# Altium PCB PCB2.PcbDoc
Units mil, origin at the board's own origin, x right, y up, seen from the top; angles counter-clockwise.
Board outline 6000 x 4000 mil, 2 copper layers (Top Layer, Bottom Layer); 57 components, 64 nets, 232 pads, 0 vias.
Unrouted connection lines stored in the file: 134.
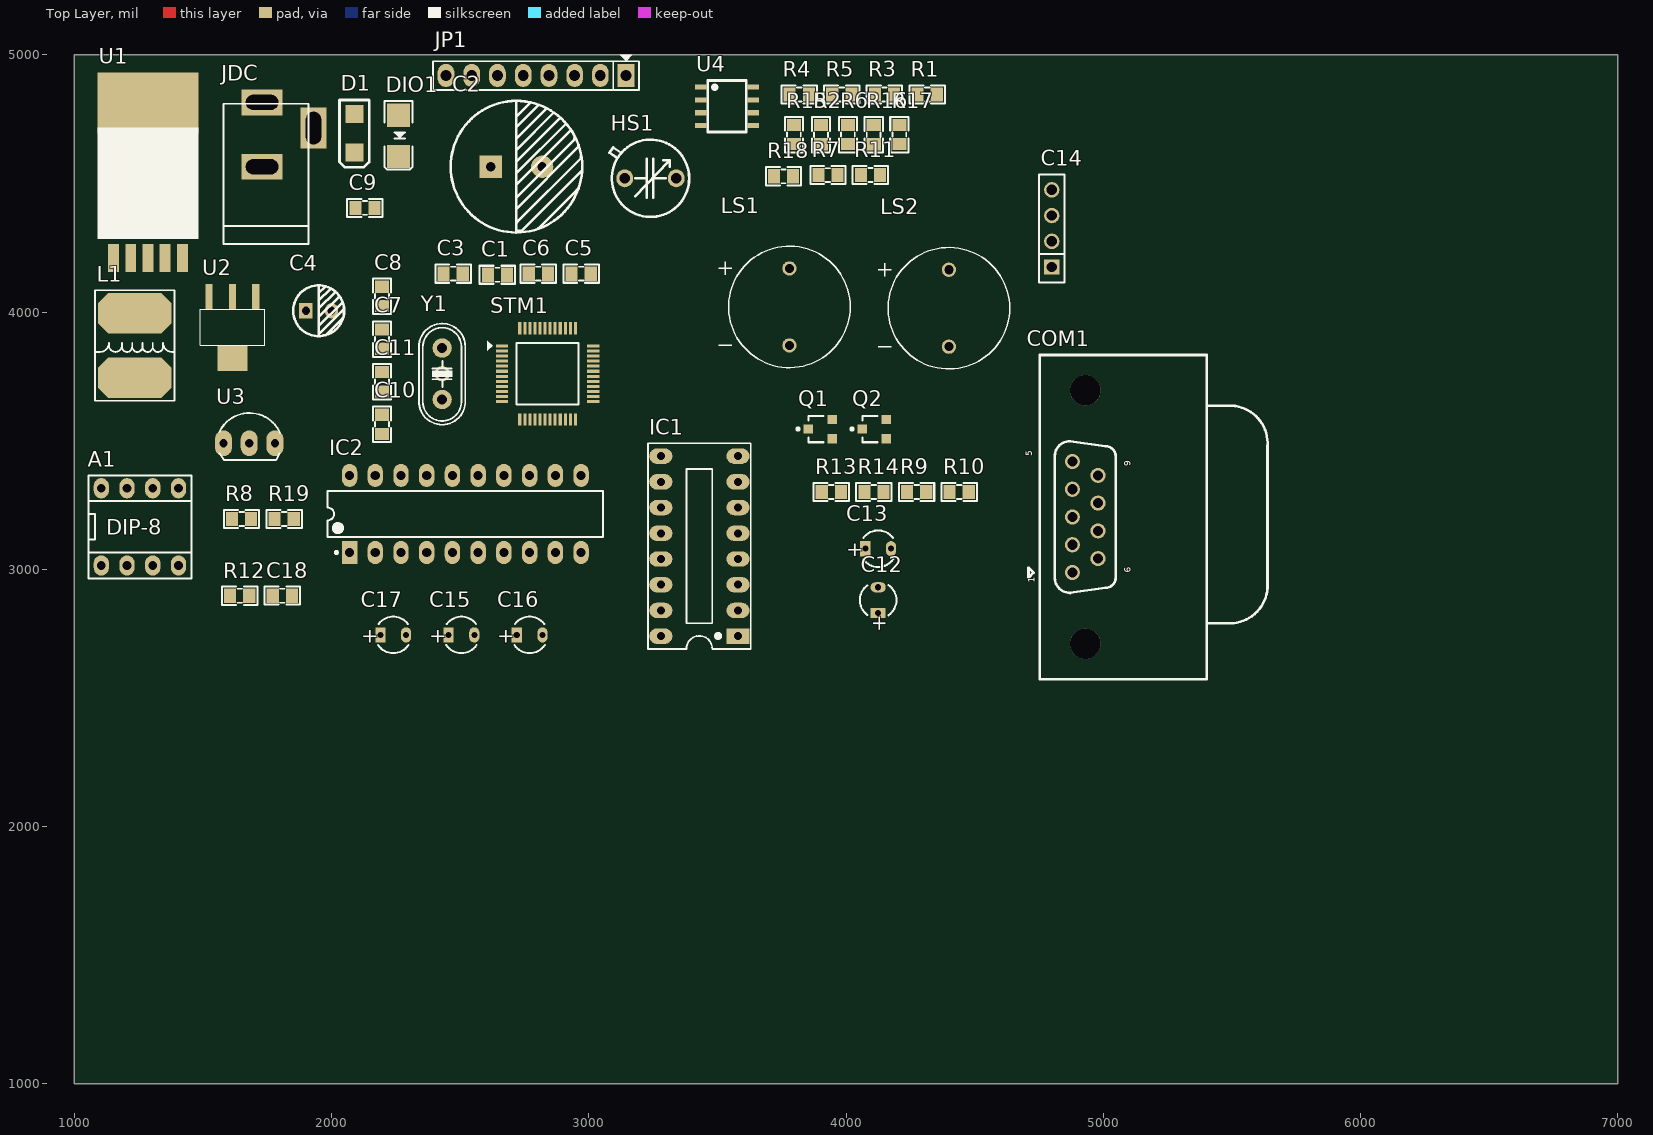
[diagram p0: Top Layer view]
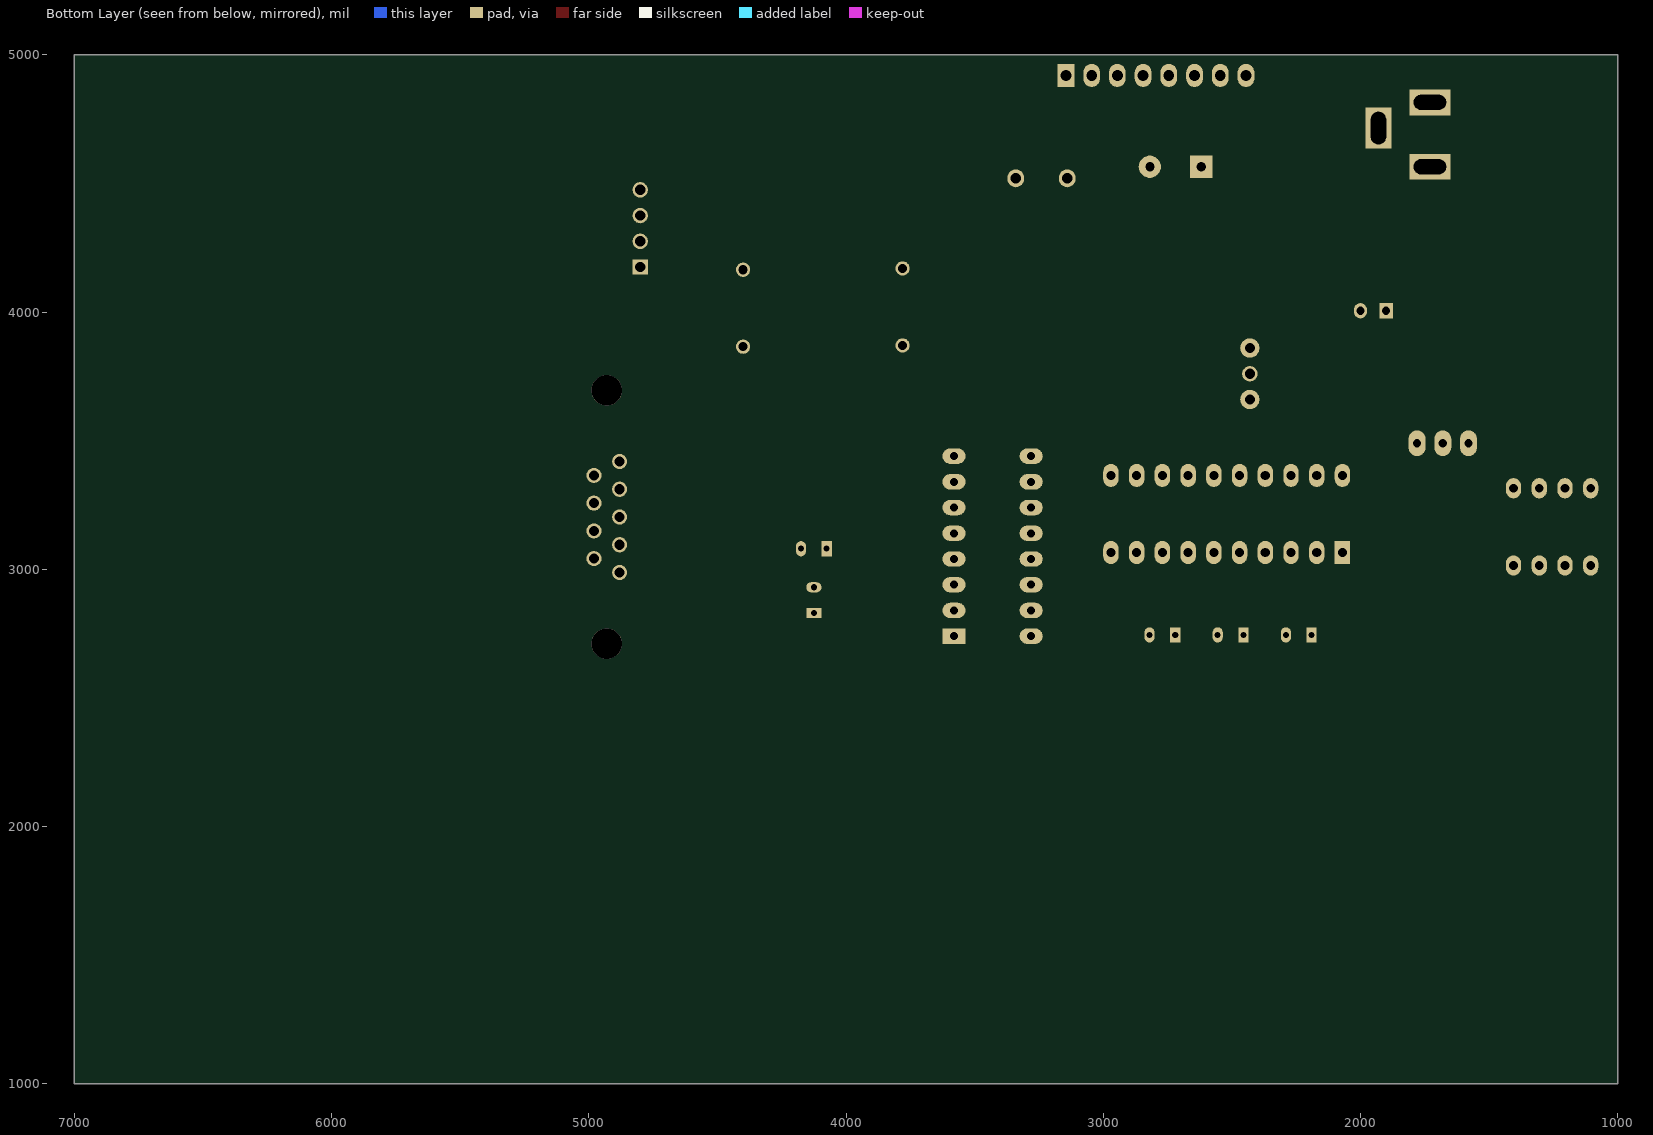
[diagram p1: Bottom Layer view, seen from below]

## Layer stack, top to bottom
Top Solder: solder mask 0.4, Solder Resist, Dk 3.5
Top Layer: signal copper 1.4
Dielectric 1: dielectric 12.6, FR-4, Dk 4.8
Bottom Layer: signal copper 1.4
Bottom Solder: solder mask 0.4, Solder Resist, Dk 3.5

## Board outline
1000,1000 7000,1000 7000,5000 1000,5000

## Design rules (kind name [scope] priority, off if disabled: settings)
Clearance [All] p1: gap=10 ignorepadtopadclearanceinfootprint=FALSE except(0: Arc-Hole Track-Hole SMDPad-Hole THPad-Hole Via-Hole Fill-Hole Poly-Hole Region-Hole Text-Hole)
PolygonConnect [All] p1: connectstyle=Relief reliefconductorwidth=10 reliefentries=4 polygonreliefangle="90 Angle" airgapwidth=10
RoutingVias [All] p1: holewidth=28 width=50 viastyle="Through Hole" minholewidth=28 minwidth=50 maxholewidth=28 maxwidth=50
SolderMaskExpansion [All] p1: expansion=4
Width [All] p1: maxlimit=10 minlimit=10 preferedwidth=10
30 further rules are at their usual default settings.

## Components (designator, comment, footprint, x,y, rotation, side; value= is the part's Value field where it differs from the comment)
A1 "LM358 SOP8" DIP8 1255,3165 r0 top
C1 "22pF" "tu 0805" 2645,4145 r0 top
C2 "680uF" "tu hoa 13mm" 2718.87,4565 r0 top
C3 "22pF" "tu 0805" 2472.68,4148.94 r180 top
C4 "220uF" "Tu hoa 5mm" 1950,4005 r0 top
C5 "100pF" "Tu 0805" 2970.3,4148.94 r180 top
C6 "100pF" "Tu 0805" 2804.42,4148.94 r180 top
C7 "100pF" "Tu 0805" 2195.79,3894.68 r90 top
C8 "100pF" "Tu 0805" 2195.79,4060.56 r90 top
C9 "104" "tu 0805" 2130,4405 r0 top
C10 "1uF" "tu 0805" 2195.79,3562.94 r90 top
C11 "10nF" "tu 0805" 2195.79,3728.81 r90 top
C12 "10uF/50V" C3MM 4125,2880 r90 top
C13 "10uF/50V" C3MM 4125,3080 r0 top
C14 "JP4" JP4-C1T 4800,4175 r90 top
C15 "10uF/50V" C3MM 2505,2745 r0 top
C16 "10uF/50V" C3MM 2770,2745 r0 top
C17 "10uF/50V" C3MM 2240,2745 r0 top
C18 "150pF" "tu 0805" 1808.61,2897.32 r0 top
COM1 "COM 9 FMALE" COM9A 4930,3203.19 r90 top value="COM 9"
D1 "Diode Zener" SMA 2090,4695.2 r90 top
DIO1 "Diode SMD" DIO-SMD-106 2260,4685 r90 top value=1N5007
HS1 "C1815 SOT23 TRANS NPN 0.15A 50V (SMD-HF)" "Cam Bien HS1101" 3240,4520 r0 top value="C?m Bi?n Ð? ?m HS1101"
IC1 "MAX232" DIP16/W0.3 3580,2740 r90 top
IC2 "ADC0804LCN" DIP20/W0.3 2520,3215 r0 top
JDC "3CELL_12V" DC-IN 1830,4690 r90 top
JP1 "LCD ST7735" JP8 3145,4920 r180 top value=JP7
L1 "33uH" "Cuon Cam 7.5x7x5" 1235,3720 r0 top
LS1 "BUZZER_T" XDCR_AI-1224-TWT-5V-R 3780,4020 r0 top
LS2 "BUZZER_T" XDCR_AI-1224-TWT-5V-R 4400,4015 r0 top
Q1 "2N222" SOT23 3900,3545 r90 top value=C1815
Q2 "2N222" SOT23 4110,3545 r90 top value=C1815
R1 "9.1k" "Tro SMD 0805" 4315.18,4848.4 r0 top
R2 "6.8k" "Tro SMD 0805" 3905,4690 r270 top
R3 "10k" "Tro SMD 0805" 4149.51,4848.4 r0 top
R4 "24k" "tro smd 0805" 3818.17,4848.4 r0 top
R5 "270k" "tro smd 0805" 3983.84,4848.4 r0 top
R6 "270k" "tro smd 0805" 4005,4690 r90 top
R7 "36k" "tro smd 0805" 3930,4530 r180 top
R8 "4.3k" "tro smd 0805" 1650.03,3198.06 r0 top
R9 "1k" "tro smd 0805" 4274.17,3303 r0 top
R10 "1k" "tro smd 0805" 4439.84,3303 r0 top
R11 "1k" "tro smd 0805" 4095,4535 r0 top
R12 "330" "tro smd 0805" 1642.83,2899.32 r0 top
R13 "10k" "tro smd 0805" 3942.83,3303 r0 top
R14 "10k" "tro smd 0805" 4108.5,3303 r0 top
R15 "360k" "Tro SMD 0805" 3795,4690 r90 top
R16 "360k" "Tro SMD 0805" 4110,4690 r270 top
R17 "150k" "Tro SMD 0805" 4205,4690 r90 top
R18 "39k" "tro smd 0805" 3757,4530 r0 top
R19 "10k" "tro smd 0805" 1815.7,3198.06 r0 top
STM1 "STM32F103C8T6" QFP50P900X900X160-48N 2840,3760 r0 top
U1 "LM2596" TO263-5 1286.14,4211 r0 top
U2 "LM1117-ADJ" LM1117-SOP 1615,4010 r180 top
U3 "LM35" QTO-92 1680,3490 r0 top
U4 "MH001514" "sop 8" 3435,4675 r270 top value="NE555 SOP8"
Y1 "12MHz" "THACH ANH CAM" 2430,3760 r90 top

## Footprints (in the part's own frame and the unit in brackets; to place one, negate y for a bottom-side part, rotate by r counter-clockwise, add the part's x,y. Pads: shape width x height; smd on the part's side, far side on the other; paste and mask are expansions set on the pad)
C3MM [mm]
  rect 1x1.5 hole 0.6: 1(-1.27,0)
  oval 1x1.5 hole 0.6: 2(1.27,0)
  silkscreen extent -1.5,-1.81 1.5,1.8, body extent -2,-2.03 1.99,1.97, height 7.01
"Cam Bien HS1101" [mil]
  oval 65x70 hole 40: 1(-100,0) 2(100,0)
  silkscreen extent -160,-150 150,150
COM9A [mm] "D-SUB- 9P, MALE, RT ANGLE, TH"
  round 1.5 hole 1 unplated: 1(-5.48,1.27) 2(-2.74,1.27) 3(0,1.27) 4(2.74,1.27) 5(5.48,1.27) 6(-4.11,-1.27) 7(-1.37,-1.27) 8(1.37,-1.27) 9(4.11,-1.27)
  round 3 hole 3 unplated: 10(-12.5,0) 11(12.5,0)
  silkscreen extent -16,-18.01 16,5.6, body extent -15.4,-17.5 15.4,4.2, height 13.2
"Cuon Cam 7.5x7x5" [mm]
  oct 7.3x4 smd: 1(0,0.635) 2(0,6.985)
  silkscreen extent -3.94,-1.65 3.94,9.27, body extent -3.5,0.07 3.5,7.8, height 5.02
DC-IN [mil] "Jac DC input"
  rect 100x160 hole 59.06 slot 125.98 at 90 deg: 1(125,100) 2(-125,100)
  rect 160x100 hole 59.06 slot 125.98 at 0 deg: 3(25,-100)
  silkscreen extent -425,-80 120,250, body extent -410,-105 134,269, height 434
DIO-SMD-106 [mil]
  rect 90x90.55 smd: 1(80,0) 2(-80,0)
  silkscreen extent -130,-55 135,55, body extent -99,-50 106,52, height 95
DIP8 [mm] "W.300/L.400"
  oval 1.5x2 hole 0.864: 1(-3.81,-3.81) 2(-1.27,-3.81) 3(1.27,-3.81) 4(3.81,-3.81) 5(3.81,3.81) 6(1.27,3.81) 7(-1.27,3.81) 8(-3.81,3.81)
  silkscreen extent -5.08,-5.08 5.08,5.08, body extent -5.4,-3.88 5.4,3.88, height 4.5
DIP16/W0.3 [mil] "16 PIN, W 300mil, Pin to pin 100mil"
  rect 60x90 hole 31: 1(0,0)
  oval 60x90 hole 31: 2(100,0) 3(200,0) 4(300,0) 5(400,0) 6(500,0) 7(600,0) 8(700,0) 9(700,300) 10(600,300) 11(500,300) 12(400,300) 13(300,300) 14(200,300) 15(100,300) 16(0,300)
  silkscreen extent -50,-50 750,350, body extent -52,-57 752,356, height 299
DIP20/W0.3 [mil] "DIP, 20-Leads, Row Spacing 7.62mm, Pitch 2.54mm, Body 25.9x6.6mm"
  rect 60x90 hole 35.43: 1(-450,-150)
  oval 60x90 hole 35.43: 2(-350,-150) 3(-250,-150) 4(-150,-150) 5(-50,-150) 6(50,-150) 7(150,-150) 8(250,-150) 9(350,-150) 10(450,-150) 11(450,150) 12(350,150) 13(250,150) 14(150,150) 15(50,150) 16(-50,150) 17(-150,150) 18(-250,150) 19(-350,150) 20(-450,150)
  silkscreen extent -535,-155 535,90, body extent -522,-153 522,155, height 180
JP4-C1T [mm] "4 row, straight, gold plating"
  rect 1.52x1.52 hole 1.02: 1(0,0)
  round 1.52 hole 1.02: 2(2.54,0) 3(5.08,0) 4(7.62,0)
  silkscreen extent -1.52,-1.27 9.14,1.27, body extent -1.52,-1.25 9.14,1.25, height 8.51
JP8 [mil] "JP8"
  rect 65x90 hole 42: 1(0,0)
  oval 65x90 hole 42: 2(100,0) 3(200,0) 4(300,0) 5(400,0) 6(500,0) 7(600,0) 8(700,0)
  silkscreen extent -50,-80 750,57, body extent -48,-50 748,48, height 354
LM1117-SOP [mm]
  rect 0.7x2.54 smd: 1(-2.3,-1.27) 2(0,-1.27) 3(2.3,-1.27)
  rect 3x2.54 smd: 2(0,4.826)
  silkscreen extent -3.18,0 3.17,3.56, body extent -3.25,-1.78 3.25,5.18, height 1.68
QFP50P900X900X160-48N [mm] "QFP,0.50mm pitch,square;12 pin X 12 pin,7.00mm X 7.00mm X 1.60mm H body"
  rect 1.2x0.3 smd: 1(-4.5,2.75) 2(-4.5,2.25) 3(-4.5,1.75) 4(-4.5,1.25) 5(-4.5,0.75) 6(-4.5,0.25) 7(-4.5,-0.25) 8(-4.5,-0.75) 9(-4.5,-1.25) 10(-4.5,-1.75) 11(-4.5,-2.25) 12(-4.5,-2.75) 25(4.5,-2.75) 26(4.5,-2.25) 27(4.5,-1.75) 28(4.5,-1.25) 29(4.5,-0.75) 30(4.5,-0.25) 31(4.5,0.25) 32(4.5,0.75) 33(4.5,1.25) 34(4.5,1.75) 35(4.5,2.25) 36(4.5,2.75)
  rect 0.3x1.2 smd: 13(-2.75,-4.5) 14(-2.25,-4.5) 15(-1.75,-4.5) 16(-1.25,-4.5) 17(-0.75,-4.5) 18(-0.25,-4.5) 19(0.25,-4.5) 20(0.75,-4.5) 21(1.25,-4.5) 22(1.75,-4.5) 23(2.25,-4.5) 24(2.75,-4.5) 37(2.75,4.5) 38(2.25,4.5) 39(1.75,4.5) 40(1.25,4.5) 41(0.75,4.5) 42(0.25,4.5) 43(-0.25,4.5) 44(-0.75,4.5) 45(-1.25,4.5) 46(-1.75,4.5) 47(-2.25,4.5) 48(-2.75,4.5)
  silkscreen extent -5.94,-3.05 3.05,3.28, body extent -4.5,-4.5 4.5,4.5, height 1.42
QTO-92 [mil] "TO-92"
  oval 66x100 hole 32: 1(-100,0) 2(0,0) 3(100,0)
  silkscreen extent -117,-65 120,118, body extent -109,-66 109,95, height 245
SMA [mil]
  rect 70x70 smd: 1(74.8,0) 2(-74.8,0)
  silkscreen extent -133,-56 129,59
"sop 8" [mil]
  rect 20x45 smd: 1(-200,0) 2(-150,0) 3(-100,0) 4(-50,0) 5(-50,205) 6(-100,205) 7(-150,205) 8(-200,205)
  silkscreen extent -225,28 -25,177
SOT23 [mm] "SOT-23; 3 Leads; Body 3.1 x 2.5 mm, inc. leads (LxW max), Alternate Lead Configuration"
  rect 0.9x0.95 smd: 1(0,1.175) 2(0.95,-1.175) 3(-0.95,-1.175)
  silkscreen extent -1.3,-0.3 1.3,2.32
"THACH ANH CAM" [mm] "Footpin for Crystal 2 pin"
  round 1.524 hole 1: 0(0,0)
  round 1.905 hole 1: 1(-2.54,0) 2(2.54,0)
  silkscreen extent -5.03,-2.29 4.96,2.29, body extent -5.93,-2.36 5.42,2.29, height 3.5
TO263-5 [mm] "LM2576-SMD"
  rect 1.07x2.75 smd: 1(-3.4,-0.025) 2(-1.7,-0.025) 3(0,-0.025) 4(1.7,-0.025) 5(3.4,-0.025)
  rect 10x6 smd: 1(0,15.289)
  silkscreen extent -5,1.85 5,12.88, body extent -5,-0.38 5,15.29, height 4.79
"Tro SMD 0805" [mm]
  rect 1.2x1.4 smd: 1(-0.946,-0.061) 2(0.954,-0.061)
  silkscreen extent -1.75,-0.97 1.75,0.84, body extent -1.56,-0.76 1.44,0.64, height 0.53
"tro smd 0805" [mm]
  rect 1.2x1.4 smd: 1(-0.946,-0.061) 2(0.954,-0.061)
  silkscreen extent -1.75,-0.97 1.75,0.84, body extent -1.56,-0.76 1.44,0.64, height 0.53
"tu 0805" [mm] "Compoment SMD 80x50mil"
  rect 1.2x1.4 smd: 1(-0.946,-0.003) 2(0.954,-0.003)
  silkscreen extent -1.75,-0.89 1.75,0.89, body extent -1.01,-0.64 1.01,0.63, height 0.61
"Tu 0805" [mm] "Compoment SMD 80x50mil"
  rect 1.2x1.4 smd: 1(-0.946,-0.003) 2(0.954,-0.003)
  silkscreen extent -1.75,-0.89 1.75,0.89, body extent -1.01,-0.64 1.01,0.63, height 0.61
"Tu hoa 5mm" [mm]
  rect 1.3x1.5 hole 0.8: 1(-1.27,0)
  oval 1.3x1.5 hole 0.8: 2(1.27,0)
  silkscreen extent -2.51,-2.51 2.51,2.51, body extent -3.12,-3.18 3.23,3.18, height 14.55
"tu hoa 13mm" [mm]
  rect 2.2x2.2 hole 0.9: 1(-2.54,0)
  round 2.2 hole 0.9: 2(2.54,0)
  silkscreen extent -6.5,-6.5 6.5,6.5, body extent -6.25,-6.25 6.26,6.25, height 23.02
XDCR_AI-1224-TWT-5V-R [mm]
  round 1.408 hole 0.9: N(0,-3.8) P(0,3.8)
  silkscreen extent -6.98,-6 6,6, body extent -6,-6 6,8.5, height 13

## Part data
A1: library part LM358, "Dán", Chung_Loai=Dán, Don_Vi=Con, Ma_Hang=MH000609, Ten_Linh_Kien="LM358 SOP8"
C1 C3: library part "Tu 0805 22pF 50V 10%", "Dán", Chung_Loai=Dán, Don_Vi=Con, Ma_Hang=MH004560, So_Chan=2, Ten_Linh_Kien="T? 0805 22P 10% 50V"
C2: library part "Tu Hoa 680uF 25V 13x17", "C?m", Chung_Loai=C?m, Don_Vi=Con, Ma_Hang=MH005082, So_Chan=2, Ten_Linh_Kien="T? Hóa 680uF 25V"
C4: library part "Tu Hoa 220uF 16V 6x11", "C?m", Chung_Loai=C?m, Don_Vi=Con, Ma_Hang=MH001348, So_Chan=2, Ten_Linh_Kien="T? Hóa 220uF 16V 6x11MM"
C5 C6 C7 C8: library part "Tu 0805 200pF 50V 10%", "Dán", Chung_Loai=Dán, Don_Vi=Con, Ma_Hang=MH008100, So_Chan=2, Ten_Linh_Kien="T? 0805 200p 10% 50V"
C9: library part "Tu 0805 104 50V 10%", "Dán", Chung_Loai=Dán, Don_Vi=Con, Ma_Hang=MH004551, So_Chan=2, Ten_Linh_Kien="T? 0805 104-100nF 10% 50V"
C10 C11: library part "Tu 0805 474 50V 10%", "Dán", Chung_Loai=Dán, Don_Vi=Con, Ma_Hang=MH006116, So_Chan=2, Ten_Linh_Kien="T? 0805 474-470nF 50V 10%"
C12 C13 C15 C16 C17: library part "Cap Pol", "Polarized Capacitor (Axial)", LatestRevisionDate=17-Jul-2002, LatestRevisionNote="Re-released for DXP Platform.", PackageReference=POLAR0.8, Published=8-Jun-2000, Publisher="Altium Limited"
C14: "WR-PHD 2.54 mm Angled Socket Header", Manufacturer="W¨¹rth Elektronik eiSos GmbH", partNo=613004143121, ComponentLink1 Description=Manufacturer, ComponentLink1URL=http://www.we-online.com, ComponentLink2 Description=Datasheet, ComponentLink2URL=http://katalog.we-online.de/em/datasheet/6130xx143121.pdf, Created by="Karrer Zheng", Created Date="29 March 2013", NoPins=04
C18: library part "Tu 0805 220nF 50V 10%", "Dán", Chung_Loai=Dán, Don_Vi=Con, Ma_Hang=MH008099, So_Chan=2, Ten_Linh_Kien="T? 0805 220nF 50V 10%"
COM1: library part COM9F, "COM 9", PackageDocument=O, DatasheetDocument=1-Sep-1999, Gender=Receptacle, LatestRevisionDate=17-Jul-2002, LatestRevisionNote="Re-released for DXP Platform.", Orientation="Right Angle", PackageReference=788750, Positions=9, Published=15-Jun-2001, Publisher="Altium Limited"
D1: "Zener Diode", LatestRevisionDate=17-Jul-2002, LatestRevisionNote="Re-released for DXP Platform.", PackageReference=DIODE-0.7, Published=8-Jun-2000, Publisher="Altium Limited"
DIO1: "Default Diode", Code - JEDEC=DO-214-AB, Published=8-Jun-2000, Publisher="Altium Limited", Revision="July-2002: Re-released for DXP Platform."
HS1: library part "Cam Bien HS1101", "C?m"
IC1: "Dual EIA-232 Driver/Receiver"
IC2: library part ADC0804, "C?m", Chung_Loai=C?m, Don_Vi=Con, Ma_Hang=MH002626, Ten_Linh_Kien="ADC0804LCN DIP20"
JDC: library part Jac_DC, "C?m", Chung_Loai=C?m, Don_Vi=Con, Ma_Hang=MH000923, Ten_Linh_Kien="Jack DC5.5x2.1MM DC5501"
JP1: library part JP8, "JP8 PIN"
L1: library part "CUON CAM 47uH_ SMD", "Dán", Chung_Loai=Dán, Don_Vi=Con, Ma_Hang=MH004211, Ten_Linh_Kien="Cu?n C?m 47uH 7x7x4MM CD74R"
LS1 LS2: library part AI-1224-TWT-5V-R, "AUDIO INDICATOR 5VDC 30MA 85DB", Package="PUI Audio, Inc.", Availability="In Stock", Check_prices=https://www.snapeda.com/parts/AI-1224-TWT-5V-R/PUI%20Audio,%20Inc./view-part/5873694/?ref=eda, MF="PUI Audio, Inc.", MP=AI-1224-TWT-5V-R, Price=None, Purchase-URL=https://pricing.snapeda.com/search/part/AI-1224-TWT-5V-R/?ref=eda, SnapEDA_Link=https://www.snapeda.com/parts/AI-1224-TWT-5V-R/PUI%20Audio,%20Inc./view-part/5873694/?ref=snap
Q1 Q2: "NPN 600mW, ECB", =C2383
R1 R2 R3 R15 R16 R17: library part "Tro 0805 5% 270k", "Dán", Chung_Loai=Dán, Don_Vi=Con, Ma_Hang=MH005333, So_Chan=2, Ten_Linh_Kien="Tr? 0805 5% 270k"
R4 R18: library part "Tro 0805 5% 1M", "Dán", Chung_Loai=Dán, Don_Vi=Con, Ma_Hang=MH005235, So_Chan=2, Ten_Linh_Kien="Tr? 0805 5% 1M"
R5 R6 R7: library part "Tro 0805 1% 15k", "Dán", Chung_Loai=Dán, Don_Vi=Con, Ma_Hang=MH005476, So_Chan=2, Ten_Linh_Kien="Tr? 0805 1% 15k"
R8 R9 R10 R11: library part "Tro 0805 1% 1k", "Dán", Chung_Loai=Dán, Don_Vi=Con, Ma_Hang=MH005468, So_Chan=2, Ten_Linh_Kien="Tr? 0805 1% 1k"
R12: library part "Tro 0805 1% 680R", "Dán", Chung_Loai=Dán, Don_Vi=Con, Ma_Hang=MH005487, So_Chan=2, Ten_Linh_Kien="Tr? 0805 1% 680R"
R13 R14: library part "Tro 0805 1% 10k", "Dán", Chung_Loai=Dán, Don_Vi=Con, Ma_Hang=MH005473, So_Chan=2, Ten_Linh_Kien="Tr? 0805 1% 10k"
R19: library part "Tro 0805 5% 10k", "Dán", Chung_Loai=Dán, Don_Vi=Con, Ma_Hang=MH005239, So_Chan=2, Ten_Linh_Kien="Tr? 0805 5% 10k"
STM1: "Dán", Chung_Loai=Dán, Don_Vi=Con, Ma_Hang=MH000567, Ten_Linh_Kien=STM32F103C8T6
U1: Max Input Voltage="12 V", Max Output Current="3 (6.0 peak) A", Max Output Voltage=mV, Temperature Range="-40 to +125 degC", Category=IC-Power, Min Input Voltage=mV, Min Output Voltage=mV, Mounting Technology="Surface Mount", Status=Unreleased, Supply Voltage=mV
U2: "800mA Low-Dropout Linear Regulator", Creator="Nguyen Ba Bien", Website=http://group3i.net
U3: "Teminal"
U4: library part NE555, "Dán"
Y1: library part XTAL, "Crystal Oscillator", LatestRevisionDate=17-Jul-2002, LatestRevisionNote="Re-released for DXP Platform.", PackageReference=R38, Published=8-Jun-2000, Publisher="Altium Limited"

## Nets (pads, with @x,y where several pads share a name; then routed paths per layer and width w, separated by ;. In a path a pad name is that pad's centre, name@x,y a point inside that pad or via, vN(x,y) a via of type N, cw(c..) or ccw(c..) an arc to the next point about the centre after c; other vN are vias at no path point)
3V3: C9.1 U2.2
+3V3: C5.2 C6.2 C7.1 C8.1 C10.1 C11.1 LS1.P LS2.P STM1.9 STM1.24 STM1.36 STM1.48
+5V: A1.8 C4.1 C14.1 C16.2 C17.1 IC1.16 IC2.20 JP1.7 L1.2 R4.1 U1.4 U2.3 U3.1 U4.4 U4.8
ADC0: IC2.18 STM1.10
ADC1: IC2.17 STM1.11
ADC2: IC2.16 STM1.12
ADC3: IC2.15 STM1.13
ADC4: IC2.14 STM1.14
ADC5: IC2.13 STM1.15
ADC6: IC2.12 STM1.16
ADC7: IC2.11 STM1.17
BLK: JP1.1
BUZZER_H: R10.1 STM1.18
BUZZER_T: R9.1 STM1.19
CS: JP1.2 STM1.39
DC: JP1.3 STM1.40
GND: C1.2 C2.2 C3.2 C4.2 C5.1 C6.1 C7.2 C8.2 C9.2 C10.2 C11.2 C14.4 C15.1 C17.2 C18.2 D1.1 HS1.1 IC1.15 IC2.1 IC2.7 IC2.8 IC2.10 JDC.2 JDC.3 JP1.8 R12.1 R18.1 STM1.8 STM1.23 STM1.35 STM1.47 U1.3 U1.5 U2.1 U3.3 U4.1
GPS_RX: C14.2 STM1.43
GPS_TX: C14.3 STM1.42
HS1101_counter: R11.2 STM1.28
INTR_ADC: IC2.5 STM1.27
NetA1_2: A1.2 R8.2 R12.2
NetA1_3: A1.3 U3.2
NetC2_1: C2.1 DIO1.2 U1.1
NetC12_1: C12.1 IC1.1
NetC12_2: C12.2 IC1.3
NetC13_1: C13.1 IC1.4
NetC13_2: C13.2 IC1.5
NetC15_2: C15.2 IC1.6
NetC16_1: C16.1 IC1.2
NetC18_1: C18.1 IC2.19 R19.1
NetCOM1_2: COM1.2 IC1.7
NetCOM1_3: COM1.3 IC1.8
NetD1_2: D1.2 L1.1 U1.2
NetDIO1_1: DIO1.1 JDC.1
NetHS1_2: HS1.2 R5.1 U4.2 U4.6
NetIC2_4: IC2.4 R19.2
NetLS1_N: LS1.N Q1.3
NetLS2_N: LS2.N Q2.3
NetQ1_1: Q1.1 R13.1
NetQ1_2: Q1.2 R9.2 R13.2
NetQ2_1: Q2.1 R14.1
NetQ2_2: Q2.2 R10.2 R14.2
NetR1_1: R1.1 R2.2
NetR1_2: R1.2 R7.2 U4.7
NetR2_1: R2.1 R3.2
NetR3_1: R3.1 R4.2
NetR5_2: R5.2 R6.1
NetR6_2: R6.2 R7.1
NetR11_1: R11.1 U4.3
NetR15_1: R15.1 R16.2
NetR15_2: R15.2 U4.5
NetR16_1: R16.1 R17.2
NetR17_1: R17.1 R18.2
OSC_IN: C1.1 STM1.5 Y1.2
OSC_OUT: C3.1 STM1.6 Y1.1
RD_ADC: IC2.2 STM1.26
RES: JP1.4 STM1.41
RXD: IC1.9 STM1.31
SCL: JP1.6 STM1.45
SDA: JP1.5 STM1.46
TXD: IC1.10 STM1.30
V_OUT_LM358: A1.1 IC2.6 R8.1
WR_ADC: IC2.3 STM1.29
pads on no net: A1.4 A1.5 A1.6 A1.7 COM1.1 COM1.4 COM1.5 COM1.6 COM1.7 COM1.8 COM1.9 COM1.10 COM1.11 IC1.11 IC1.12 IC1.13 IC1.14 IC2.9 STM1.1 STM1.2 STM1.3 STM1.4 STM1.7 STM1.20 STM1.21 STM1.22 STM1.25 STM1.32 STM1.33 STM1.34 STM1.37 STM1.38 STM1.44 Y1.0

## Text inside footprints (layer, text, board x,y; h text height)
A1: Top Overlay "DIP-8" at 1125,3135 h59.05
C12: Top Overlay "+" at 4155,2755 h60 r90
C13: Top Overlay "+" at 4000,3050 h60
C15: Top Overlay "+" at 2380,2715 h60
C16: Top Overlay "+" at 2645,2715 h60
C17: Top Overlay "+" at 2115,2715 h60
COM1: Top Overlay "6" at 5107.17,2986.65 h25 r90; Top Overlay "9" at 5107.17,3400.04 h25 r90; Top Overlay "5" at 4723.31,3439.41 h25 r90; Top Overlay "1" at 4733.15,2947.28 h25 r90